# Altium PCB LTM455_pcb.PcbDoc
Units mm, origin at the board's own origin, x right, y up, seen from the top; angles counter-clockwise.
Board outline 13.7 x 13.42 mm, 4 copper layers (Top Layer, Layer 1, Layer 2, Bottom Layer 1), stack 0.775 mm thick; 3 components, 3 nets, 10 pads, 137 vias.
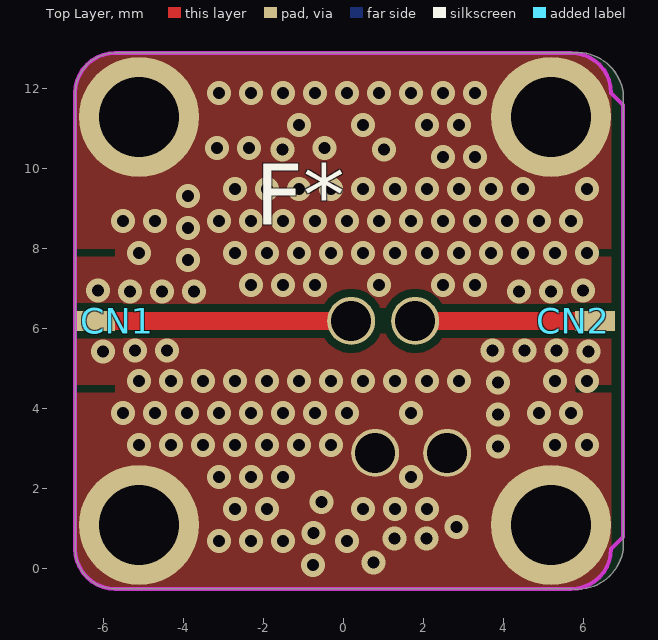
[diagram p0: Top Layer view]
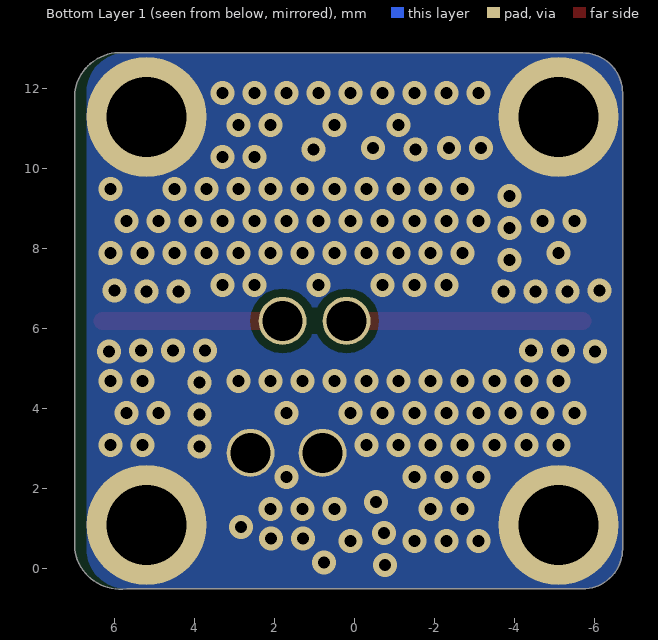
[diagram p1: Bottom Layer 1 view, seen from below]
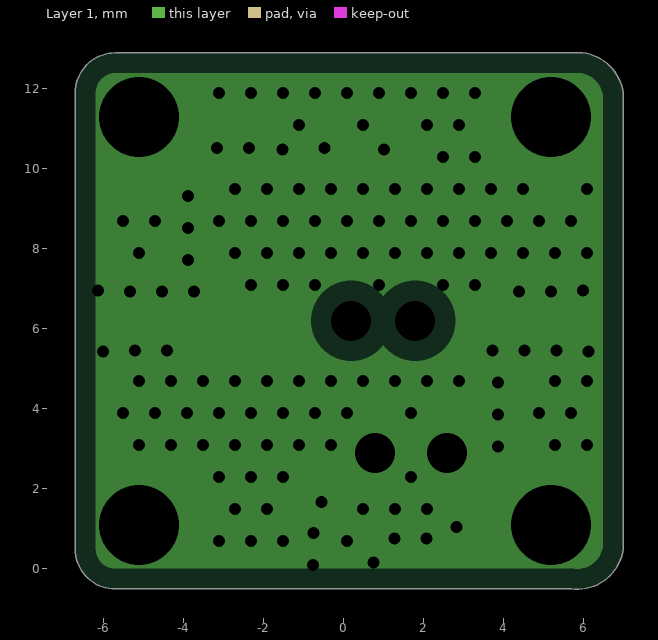
[diagram p2: Layer 1, clearances drawn from the general rule]
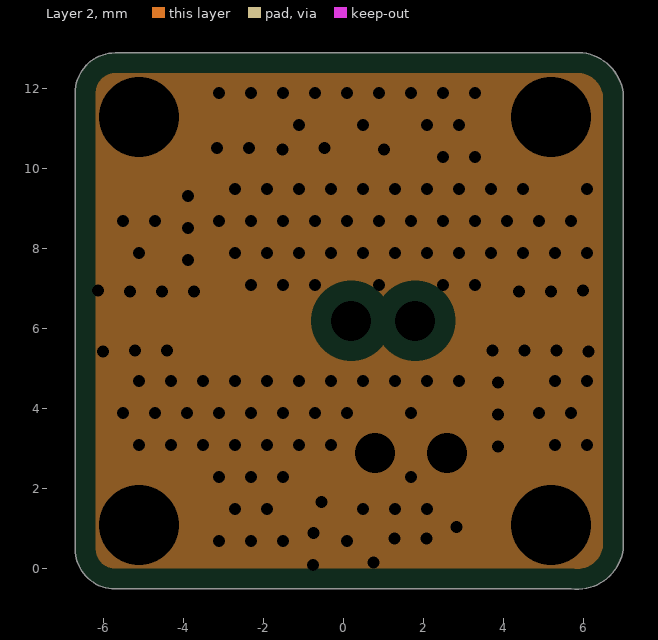
[diagram p3: Layer 2, clearances drawn from the general rule]

## Layer stack, top to bottom
Top Solder: solder mask 0.0102, Solder Resist, Dk 3.5
Top Layer: signal copper 0.035
Dielectric 2: prepreg 0.254, PP-006, Dk 4.1
Layer 1: plane copper 0.035, net GND
Dielectric 1: dielectric 0.127, FR-4, Dk 4.8
Layer 2: plane copper 0.035, net GND
Dielectric 3: prepreg 0.254, PP-006, Dk 4.1
Bottom Layer 1: signal copper 0.035
Bottom Solder: solder mask 0.0102, Solder Resist, Dk 3.5

## Board outline
-6.7,0.5 -6.7,11.9 cw(c-5.7,11.9) -5.7,12.9 5.7,12.9 cw(c5.85,11.75) 7,11.9 7,0.5 cw(c5.851,0.648) 5.7,-0.5 -5.7,-0.5 cw(c-5.7,0.5)

## Design rules (kind name [scope] priority, off if disabled: settings)
Clearance [All] p1: gap=0.2 ignorepadtopadclearanceinfootprint=FALSE
HoleSize [All] p1: absolutevalues=TRUE maxlimit=5 minlimit=0.3 maxpercent=80.000 minpercent=20.000
PlaneClearance [All] p1: clearance=0.508
PlaneConnect [All] p1: planeconnectstyle=Direct reliefexpansion=0.508 reliefentries=4 reliefconductorwidth=0.254 reliefairgap=0.254
PolygonConnect [All] p1: connectstyle=Direct reliefconductorwidth=0.254 reliefentries=4 polygonreliefangle="90 Angle" airgapwidth=0.254
RoutingVias [All] p1: holewidth=0.711 width=1.27 viastyle="Through Hole" minholewidth=0.711 minwidth=1.27 maxholewidth=0.711 maxwidth=1.27 useviatemplates=TRUE viatemplateguid#1={1D05145B-BDB7-4956-A3F8-6AD92407EAD6} viatemplatename#1=v60h30m0mx0
SolderMaskExpansion [All] p1: expansion=0.102
Width Width_50ohm [InNetClass('50ohm')] p1: maxlimit=0.45 minlimit=0.45 preferedwidth=0.45 impedanceprofiledriven=TRUE impedanceprofileid={D2B77361-9B7D-4BD5-B69E-70E315500705} impedanceprofilevalue=50.000000 minimp=50.000000 maximp=50.000000 favimp=50.000000 checkconnectedcopper=TRUE
Width [All] p2: maxlimit=5 minlimit=0.2 preferedwidth=0.2
27 further rules are at their usual default settings.

## Classes and differential pairs
net class 50ohm: NetCN2_1

## Components (designator, comment, footprint, x,y, rotation, side; value= is the part's Value field where it differs from the comment)
CN1 "X-CONNECTOR" X-CONNECTOR-PCB -5.1,11.3 r0 top
CN2 "X-CONNECTOR" X-CONNECTOR-PCB 5.2,1.1 r180 top
F* "LTM455EU" "New footprint 1" 1.8,6.2 r0 top

## Footprints (in the part's own frame and the unit in brackets; to place one, negate y for a bottom-side part, rotate by r counter-clockwise, add the part's x,y. Pads: shape width x height; smd on the part's side, far side on the other; paste and mask are expansions set on the pad)
"New footprint 1" [mm]
  round 1.2 hole 1: 1(-1.6,0) 2(0,0) 3(-1,-3.3) 4(0.8,-3.3)
X-CONNECTOR-PCB [mm]
  rect 1x0.5 smd: 1(-1.1,-5.1)
  round 3 hole 2: M1(0,0) M2(0,-10.2)
  Top Layer pour cut-out: -1.616,-3.576
  Top Layer pour cut-out: -1.6,-3.5 -0.6,-3.5 -0.6,-3.3 -1.6,-3.3
  Top Layer pour cut-out: -0.6,-6.7 -1.6,-6.7 -1.6,-6.9 -0.6,-6.9

## Part data
CN1 CN2: library part X-CONNECTOR-5, "CONECTOR PARA MÓDULOS X MICROWAVE", Mount=TH, RoHS=Yes
F*: library part LTM455EU-01.A.1, "Ceramic band pass filter fc = 455khz"

## Via types
v1: diameter 0.6, hole 0.3, Top Layer to Bottom Layer 1, tented both sides, 137 vias

## Nets (pads, with @x,y where several pads share a name; then routed paths per layer and width w, separated by ;. In a path a pad name is that pad's centre, name@x,y a point inside that pad or via, vN(x,y) a via of type N, cw(c..) or ccw(c..) an arc to the next point about the centre after c; other vN are vias at no path point)
GND: CN1.M1 CN1.M2 CN2.M1 CN2.M2 F*.3 F*.4
  other v1: -0.76,0.096 0.76,0.161 -3.1,0.7 -2.3,0.7 -1.5,0.7 0.1,0.7 1.289,0.761 2.089,0.764 -0.739,0.895 2.835,1.053 -2.7,1.5 -1.9,1.5 0.5,1.5 1.3,1.5 2.1,1.5 -0.541,1.67 -3.1,2.3 -2.3,2.3 -1.5,2.3 1.7,2.3 3.875,3.065 -5.1,3.1 -4.3,3.1 -3.5,3.1 -2.7,3.1 -1.9,3.1 -1.1,3.1 -0.3,3.1 5.3,3.1 6.1,3.1 3.875,3.865 -5.5,3.9 -4.7,3.9 -3.9,3.9 -3.1,3.9 -2.3,3.9 -1.5,3.9 -0.7,3.9 0.1,3.9 1.7,3.9 4.9,3.9 5.7,3.9 3.875,4.665 -5.1,4.7 -4.3,4.7 -3.5,4.7 -2.7,4.7 -1.9,4.7 -1.1,4.7 -0.3,4.7 0.5,4.7 1.3,4.7 2.1,4.7 2.9,4.7 5.3,4.7 6.1,4.7 -6.007,5.44 6.135,5.44 -5.207,5.461 -4.407,5.461 3.735,5.461 4.535,5.461 5.335,5.461 -5.328,6.939 -4.528,6.939 -3.728,6.939 4.399,6.939 5.199,6.939 -6.128,6.96 5.999,6.96 -2.3,7.1 -1.5,7.1 -0.7,7.1 0.9,7.1 2.5,7.1 3.3,7.1 -3.875,7.726 -5.1,7.9 -2.7,7.9 -1.9,7.9 -1.1,7.9 -0.3,7.9 0.5,7.9 1.3,7.9 2.1,7.9 2.9,7.9 3.7,7.9 4.5,7.9 5.3,7.9 6.1,7.9 -3.875,8.526 -5.5,8.7 -4.7,8.7 -3.1,8.7 -2.3,8.7 -1.5,8.7 -0.7,8.7 0.1,8.7 0.9,8.7 1.7,8.7 2.5,8.7 3.3,8.7 4.1,8.7 4.9,8.7 5.7,8.7 -3.875,9.326 -2.7,9.5 -1.9,9.5 -1.1,9.5 -0.3,9.5 0.5,9.5 1.3,9.5 2.1,9.5 2.9,9.5 3.7,9.5 4.5,9.5 6.1,9.5 2.5,10.3 3.3,10.3 -1.52,10.481 1.02,10.481 -3.156,10.52 -2.356,10.52 -0.461,10.52 -1.1,11.1 0.5,11.1 2.1,11.1 2.9,11.1 -3.1,11.9 -2.3,11.9 -1.5,11.9 -0.7,11.9 0.1,11.9 0.9,11.9 1.7,11.9 2.5,11.9 3.3,11.9
NetCN1_1: CN1.1 F*.1 | length 5.9
  Top Layer w0.45: -5.7,6.2 F*.1
NetCN2_1: CN2.1 F*.2 | length 4.5
  Top Layer w0.45: F*.2 CN2.1

## Polygon pours and split planes (outlines as drawn)
GND on Bottom Layer 1 "Bottom Layer 1-GND" (solid, pour order 3): -5.7,-0.5 cw(c-5.7,0.5) -6.7,0.5 -6.7,11.9 cw(c-5.7,11.9) -5.7,12.9 5.7,12.9 cw(c5.7,11.9) 6.7,11.9 6.7,0.5 cw(c5.7,0.5) 5.7,-0.5
GND on Top Layer "Top Layer-GND" (solid, pour order 5): -5.7,-0.5 cw(c-5.7,0.5) -6.7,0.5 -6.7,11.9 cw(c-5.7,11.9) -5.7,12.9 5.7,12.9 cw(c5.7,11.9) 6.7,11.9 6.7,0.5 cw(c5.7,0.5) 5.7,-0.5
GND on Layer 1 (split plane): 5.952,12.393 6.051,12.369 6.146,12.33 6.233,12.277 6.31,12.21 6.377,12.133 6.43,12.046 6.469,11.951 6.49,11.867 6.49,0.532 6.469,0.448 6.43,0.353 6.377,0.267 6.311,0.189 6.233,0.123 6.146,0.069 6.052,0.03 5.953,0.007 5.851,-0.001 5.767,0.005 5.766,0.004 5.7,0.01 -5.7,0.01 -5.712,0.009 -5.796,0.018 -5.888,0.046 -5.973,0.091 -6.048,0.152 -6.109,0.227 -6.154,0.312 -6.182,0.404 -6.191,0.488 -6.19,0.5 -6.19,11.9 -6.191,11.912 -6.182,11.996 -6.154,12.088 -6.109,12.173 -6.048,12.248 -5.973,12.309 -5.888,12.354 -5.796,12.382 -5.712,12.391 -5.7,12.39 5.7,12.39 5.766,12.396 5.766,12.395 5.85,12.401
GND on Layer 2 (split plane): 5.952,12.393 6.051,12.369 6.146,12.33 6.233,12.277 6.31,12.21 6.377,12.133 6.43,12.046 6.469,11.951 6.49,11.867 6.49,0.532 6.469,0.448 6.43,0.353 6.377,0.267 6.311,0.189 6.233,0.123 6.146,0.069 6.052,0.03 5.953,0.007 5.851,-0.001 5.767,0.005 5.766,0.004 5.7,0.01 -5.7,0.01 -5.712,0.009 -5.796,0.018 -5.888,0.046 -5.973,0.091 -6.048,0.152 -6.109,0.227 -6.154,0.312 -6.182,0.404 -6.191,0.488 -6.19,0.5 -6.19,11.9 -6.191,11.912 -6.182,11.996 -6.154,12.088 -6.109,12.173 -6.048,12.248 -5.973,12.309 -5.888,12.354 -5.796,12.382 -5.712,12.391 -5.7,12.39 5.7,12.39 5.766,12.396 5.766,12.395 5.85,12.401

## Keep-outs
Top Layer:
  lines w0.1: -6.7,0.5 ccw(c-5.7,0.5) -5.7,-0.5 5.7,-0.5 ccw(c5.7,0.5) 6.7,0.5 7,0.8 7,3.65 7,8.75 7,11.6 6.7,11.9 ccw(c5.7,11.9) 5.7,12.9 -5.7,12.9 ccw(c-5.7,11.9) -6.7,11.9 -6.7,0.5

## Silkscreen, mask and mechanical layers (free items; w line width, h text height)
Mechanical 1:
  lines w0.2: -6.7,0.5 ccw(c-5.7,0.5) -5.7,-0.5 5.7,-0.5 ccw(c5.7,0.5) 6.7,0.5 6.7,11.9 ccw(c5.7,11.9) 5.7,12.9 -5.7,12.9 ccw(c-5.7,11.9) -6.7,11.9 -6.7,0.5